# EAGLE board grubClub_v3 (EAGLE 9.6.2)
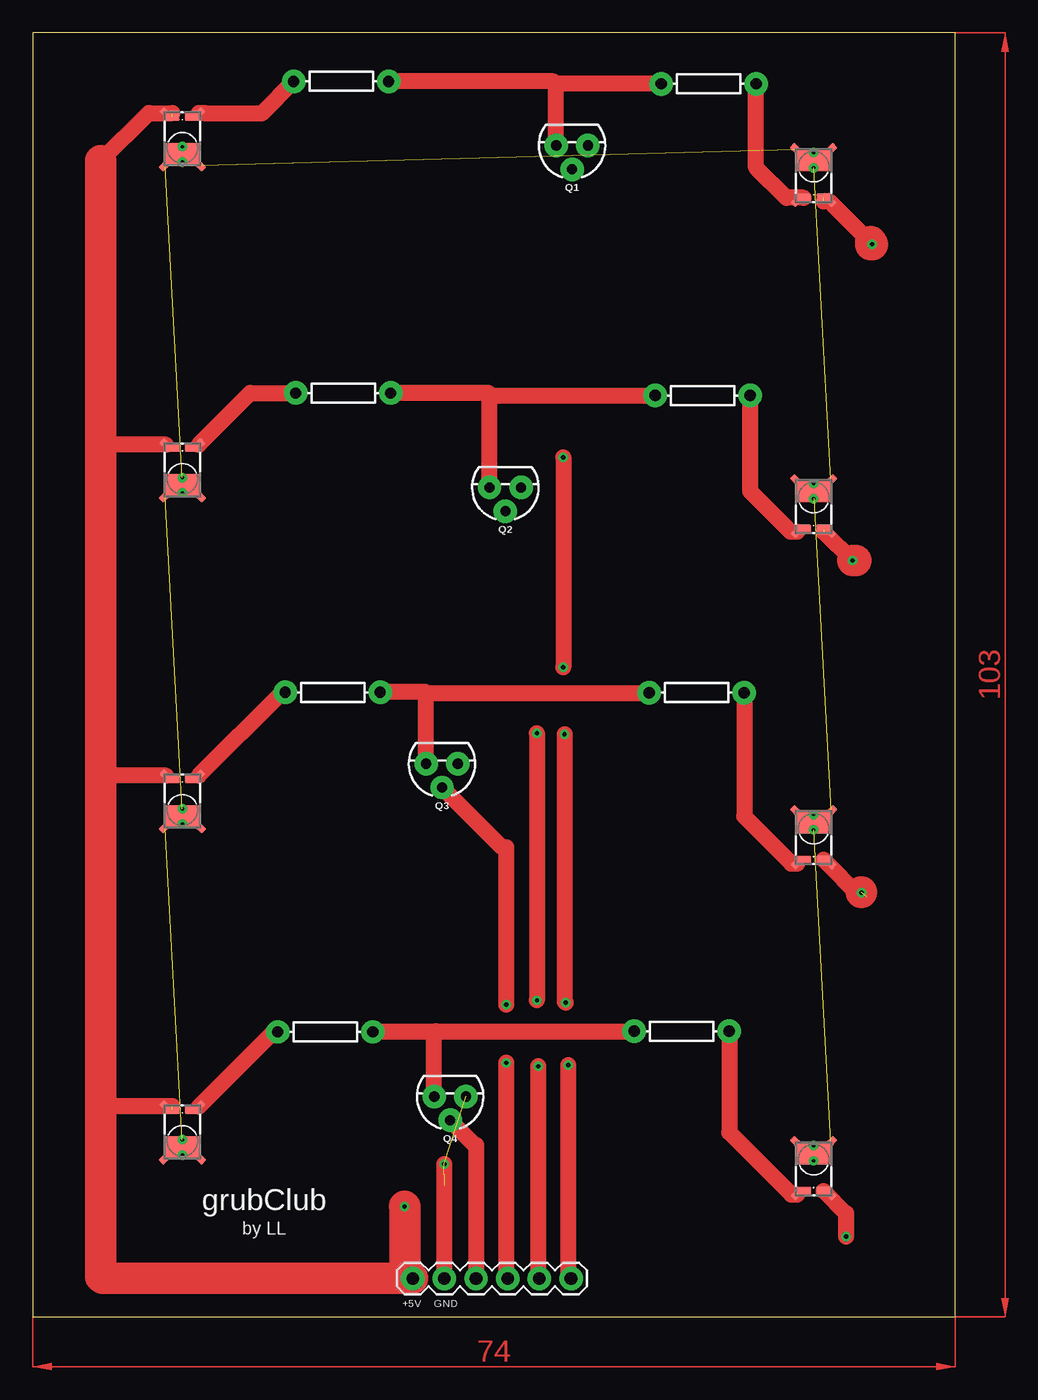
[diagram p0: board, top side]
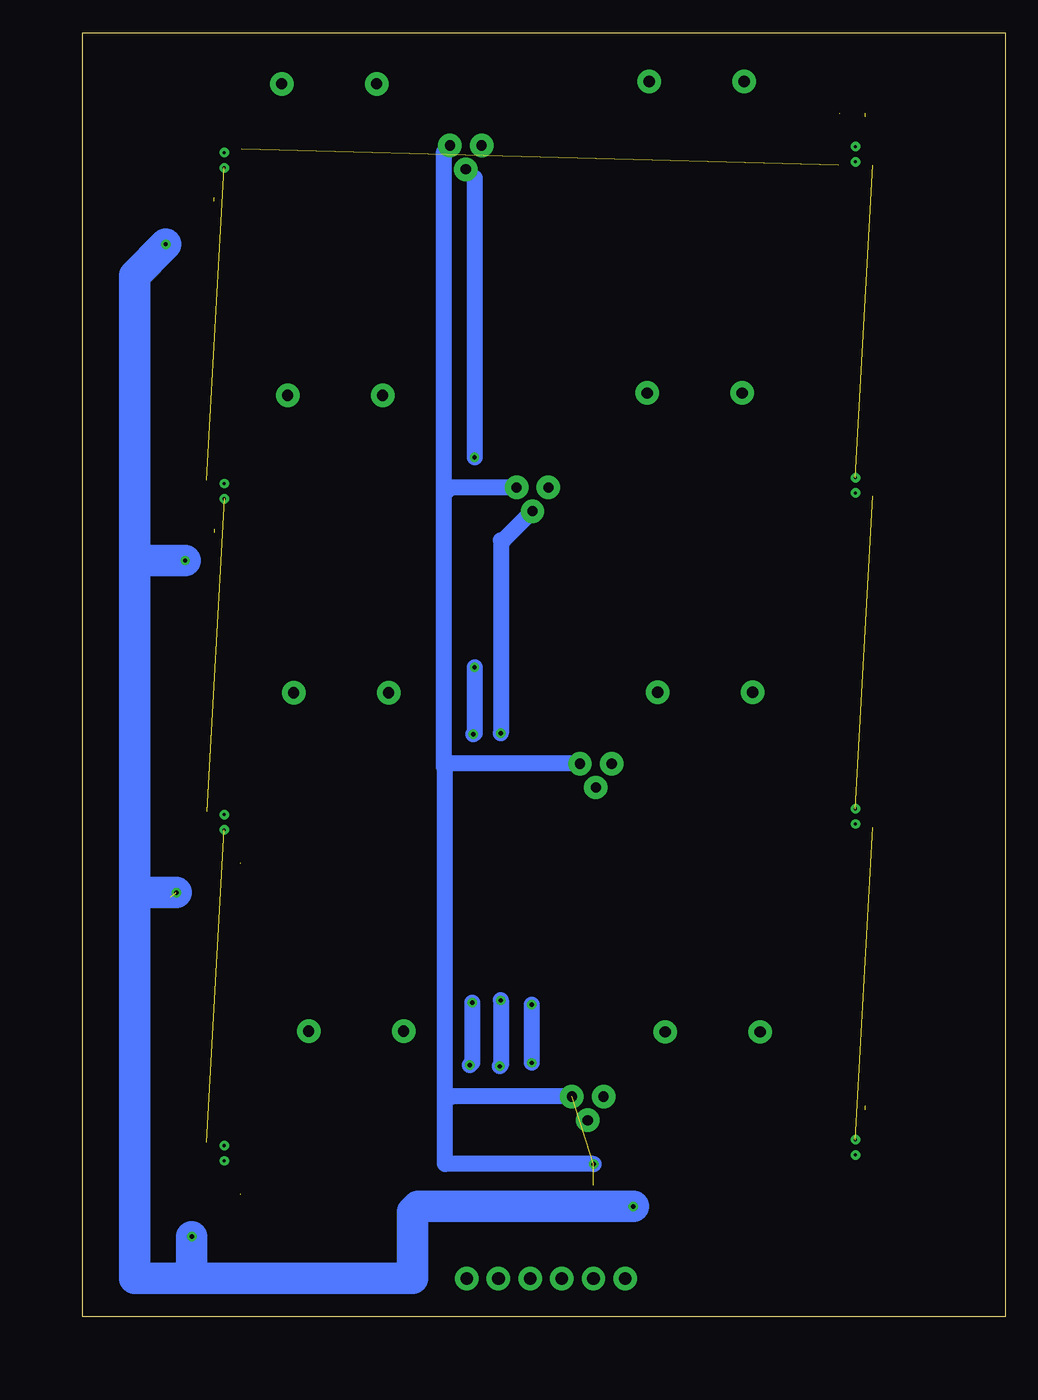
[diagram p1: board, bottom side, seen from below]

Size 74 x 103 mm. Coordinates in mm from the lower left corner, seen from the top.
Outline: 0,0 74,0 74,103 0,103 0,0
Copper layers (1*16): Top 0.035mm / dielectric 0.15mm / Bottom 0.035mm
Design rules "default": minimum track width 6mil, minimum drill 0.35mm, track to track 6mil, track to pad 6mil, pad to pad 6mil, via to via 6mil, smd to smd 6mil, copper to edge 40mil, drill to drill 6mil, minimum pad ring 10mil, minimum via ring 8mil, stop-mask expansion 4mil, vias tented up to drill 0mil, thermal gap 10mil

## Footprints (pad centres in the part's own frame; a part is rotated, then mirrored left to right if it is on the bottom)
1X06 = drill 1.016 pad 1.88: 1 0,0; 2 2.54,0; 3 5.08,0; 4 7.62,0; 5 10.16,0; 6 12.7,0
LUXEON_REBEL = smd 1.2 x 0.67: A 0.8,-2.51; C -0.8,-2.51 | smd 1 x 0.6 rotated 315: A@1 1.31,-2.75 | smd 1 x 0.6 rotated 225: C@1 -1.31,-2.75 | smd 2.8 x 1.77: TH 0,0.51 | smd 1 x 0.6 rotated 135: TH@1 -1.39,1.39 | smd 1 x 0.6 rotated 45: TH@2 1.39,1.39 | drill 0.25 pad 0.4: TH@3 0,-0.095; TH@4 0,1.125
TO-92 = drill 0.813 pad 1.88: 1 -1.27,0; 2 0,1.905; 3 1.27,0
AXIAL-0.3 = drill 0.9 pad 1.88: P$1 -3.81,0; P$2 3.81,0

## Placement (x,y rotation side)
J6  [1X06]  43.18,3.08 180 top
LED1  LUXEON_REBEL  [LUXEON_REBEL]  12,93.77 180 top
LED2  LUXEON_REBEL  [LUXEON_REBEL]  62.65,92.27 0 top
LED3  LUXEON_REBEL  [LUXEON_REBEL]  12,67.22 180 top
LED4  LUXEON_REBEL  [LUXEON_REBEL]  62.65,65.72 0 top
LED5  LUXEON_REBEL  [LUXEON_REBEL]  12,40.66 180 top
LED6  LUXEON_REBEL  [LUXEON_REBEL]  62.65,39.16 0 top
LED7  LUXEON_REBEL  [LUXEON_REBEL]  12,14.11 180 top
LED8  LUXEON_REBEL  [LUXEON_REBEL]  62.65,12.61 0 top
Q1  200mA/40V  [TO-92]  43.26,93.96 180 top
Q2  200mA/40V  [TO-92]  37.91,66.53 180 top
Q3  200mA/40V  [TO-92]  32.83,44.37 180 top
Q4  200mA/40V  [TO-92]  33.48,17.67 180 top
R1  [AXIAL-0.3]  23.46,22.86 0 top
R2  [AXIAL-0.3]  24.06,50.1 0 top
R3  [AXIAL-0.3]  24.9,74.1 0 top
R4  [AXIAL-0.3]  24.74,99.1 0 top
R5  [AXIAL-0.3]  54.22,98.91 0 top
R6  [AXIAL-0.3]  52.06,22.91 0 top
R7  [AXIAL-0.3]  53.26,50.07 0 top
R8  [AXIAL-0.3]  53.74,73.91 0 top

## Library data of the parts
J6 = SparkFun-Connectors; PROD_ID: CONN-08437
LED1-LED8 = led-lumiled; OC_FARNELL: unknown; OC_NEWARK: unknown
Q1-Q4 = SparkFun-DiscreteSemi; PROD_ID: TRANS-08447
R1-R8 = SparkFun-Resistors

## Nets
N$1: LED7.C LED7.C@1 R1.P$1
N$2: J6.4 Q4.2
N$3: J6.3 Q3.2
N$4: J6.2 Q2.2
N$5: J6.1 Q1.2
N$6: LED1.C LED1.C@1 R4.P$1
N$7: J6.6 LED1.A LED1.A@1 LED2.A LED2.A@1 LED3.A LED3.A@1 LED4.A LED4.A@1 LED6.A LED6.A@1 LED7.A LED7.A@1 LED8.A LED8.A@1
N$8: LED3.C LED3.C@1 R3.P$1
N$9: LED5.C LED5.C@1 R2.P$1
N$10: LED8.C LED8.C@1 R6.P$2
N$11: LED6.C LED6.C@1 R7.P$2
N$12: LED4.C LED4.C@1 R8.P$2
N$13: LED2.C LED2.C@1 R5.P$2
N$14: Q1.3 R4.P$2 R5.P$1
N$15: Q2.3 R3.P$2 R8.P$1
N$16: Q3.3 R2.P$2 R7.P$1
N$17: Q4.3 R1.P$2 R6.P$1
N$18: J6.5 Q1.1 Q2.1 Q3.1 Q4.1
S$1: LED5.A LED5.A@1
TH: LED1.TH LED1.TH@1 LED1.TH@2 LED1.TH@3 LED1.TH@4 LED2.TH LED2.TH@1 LED2.TH@2 LED2.TH@3 LED2.TH@4 LED3.TH LED3.TH@1 LED3.TH@2 LED3.TH@3 LED3.TH@4 LED4.TH LED4.TH@1 LED4.TH@2 LED4.TH@3 LED4.TH@4 LED5.TH LED5.TH@1 LED5.TH@2 LED5.TH@3 LED5.TH@4 LED6.TH LED6.TH@1 LED6.TH@2 LED6.TH@3 LED6.TH@4 LED7.TH LED7.TH@1 LED7.TH@2 LED7.TH@3 LED7.TH@4 LED8.TH LED8.TH@1 LED8.TH@2 LED8.TH@3 LED8.TH@4

## Tracks (layer width: path | path; a pad name or v marks a point on that pad's centre or on a via)
N$1
  Top 1.27: LED7.C@1 19.31,22.86 R1.P$1
N$2
  Top 1.27: Q4.2 35.47,13.78 35.57,13.78 J6.4
N$3  (via drill 0.35)
  Top 1.27: Q3.2 37.62,37.68 37.98,37.68 v37.98,25.05 | v37.98,20.38 37.98,3.2 J6.3
  Bottom 1.27: v37.98,25.05 v37.98,20.38
N$4  (via drill 0.35)
  Top 1.27: v40.45,46.83 v40.45,25.38 | v40.54,20.1 40.54,3.18 J6.2
  Bottom 1.27: Q2.2 40.23,62.31 40.45,62.31 v40.45,46.83 | v40.45,25.38 40.45,20.19 v40.54,20.1
N$5  (via drill 0.35)
  Top 1.27: v42.56,68.94 v42.56,52.11 | v42.66,46.73 42.66,25.29 v42.75,25.19 | v42.94,20.19 42.94,3.32 J6.1
  Bottom 1.27: Q1.2 42.56,91.35 v42.56,68.94 | v42.56,52.11 42.56,46.83 v42.66,46.73 | v42.75,25.19 42.75,20.38 v42.94,20.19
N$6  (1 unrouted)
  Top 1.27: R4.P$1 18.35,96.52 13.85,96.52 13.8,96.56 13.31,96.56
N$7  (via drill 0.35)  (5 unrouted)
  Top 1.27: LED3.A@1 5.52,69.97 | 5.46,17.93 6.48,16.91 11.2,16.91 | LED8.A 65.24,8.31 v65.24,6.44 | LED6.A 66.41,33.69 66.95,33.69 | v65.78,60.67 63.52,62.92 63.45,62.92 | v67.33,86.04 63.9,89.47 63.45,89.47 | 5.46,92.73 9.3,96.56 11.2,96.56
  Top 2.54: 5.46,69.91 5.46,17.93 5.46,3.21 5.59,3.08 J6.6 29.86,3.7 29.86,8.81 v29.82,8.85 | 5.46,69.91 5.46,92.73 | 5.52,69.97 5.46,69.91 | v67.33,86.04 67.33,85.99 67.22,85.99 67.22,86.26 | 66.05,60.67 v65.78,60.67 | 66.49,34.08 v66.49,34.03
  Bottom 2.54: v29.82,8.85 47.1,8.85 47.52,8.43 47.52,3.09 65.47,3.09 | 65.47,3.09 69.84,3.09 69.84,33.97 | v67.33,86.04 69.84,83.53 69.84,60.32 | 69.84,33.97 69.84,60.32 | v65.78,60.67 69.49,60.67 69.84,60.32 | v66.49,34.03 69.79,34.03 69.84,33.97 | v65.24,6.44 65.24,3.32 65.47,3.09
N$8
  Top 1.27: LED3.C@1 17.44,74.1 R3.P$1
N$9
  Top 1.27: LED5.C@1 20,50.1 R2.P$1
N$10  (1 unrouted)
  Top 1.27: 61.34,9.81 60.84,9.81 55.87,14.79 R6.P$2
N$11  (1 unrouted)
  Top 1.27: 61.34,36.37 60.84,36.37 57.07,40.14 R7.P$2
N$12
  Top 1.27: R8.P$2 57.55,66.21 60.8,62.97 LED4.C@1
N$13
  Top 1.27: R5.P$2 58.03,92.19 60.46,89.76 LED2.C
N$14
  Top 1.27: Q1.3 41.99,98.85 41.87,98.97 | 41.87,98.97 50.34,98.97 R5.P$1 | 41.87,98.97 41.74,99.1 R4.P$2
N$15
  Top 1.27: Q2.3 36.64,73.79 36.75,73.89 | 36.75,73.89 36.54,74.1 R3.P$2 | 36.75,73.89 36.76,73.91 R8.P$1
N$16
  Top 1.27: Q3.3 31.56,50.04 | 31.56,50.04 31.47,50.14 27.91,50.14 R2.P$2 | 31.56,50.04 49.42,50.04 R7.P$1
N$17
  Top 1.27: Q4.3 32.21,22.79 | R1.P$2 32.14,22.86 32.21,22.79 | 32.21,22.79 32.33,22.91 R6.P$1
N$18  (via drill 0.35)  (2 unrouted)
  Top 1.27: 33,3.1 J6.5 v33.02,12.25 v33.01,12.26 | 33.02,10.54 33.01,10.55
  Bottom 1.27: 45,44 45,66 | 45,66 45,93.49 Q1.1 | Q4.1 44.33,17.67 | Q3.1 44.63,44.37 45,44 | Q2.1 44.47,66.53 45,66 | 45,44 44.94,43.94 44.94,15.99 44.94,12.29 44.91,12.26 v33.01,12.26
S$1
  Top 1.27: LED5.A@1 5.96,43.41 5.92,43.45
TH  (7 unrouted)
(copper drawn outside any net)
  shapes: Top area x3

## Text on the board
tNames: grubClub | by LL | +5V | GND